# EAGLE board UHF-RLB (EAGLE 5.07)
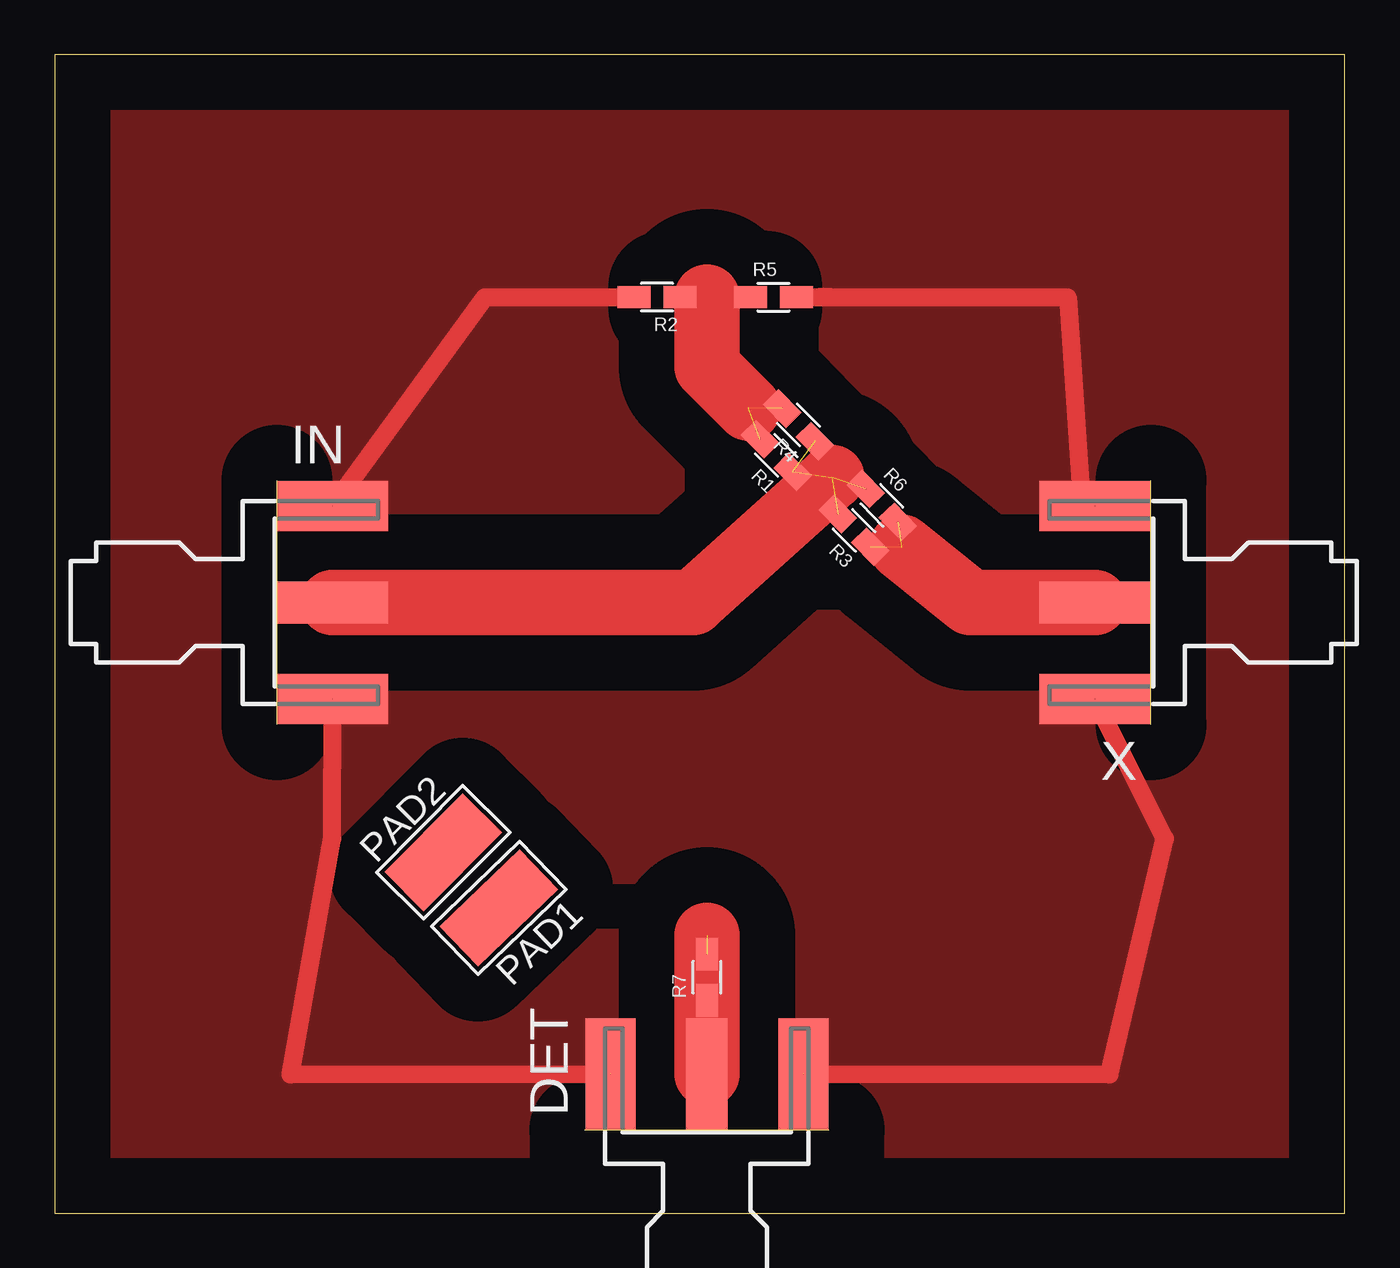
[diagram p0: board, top side]
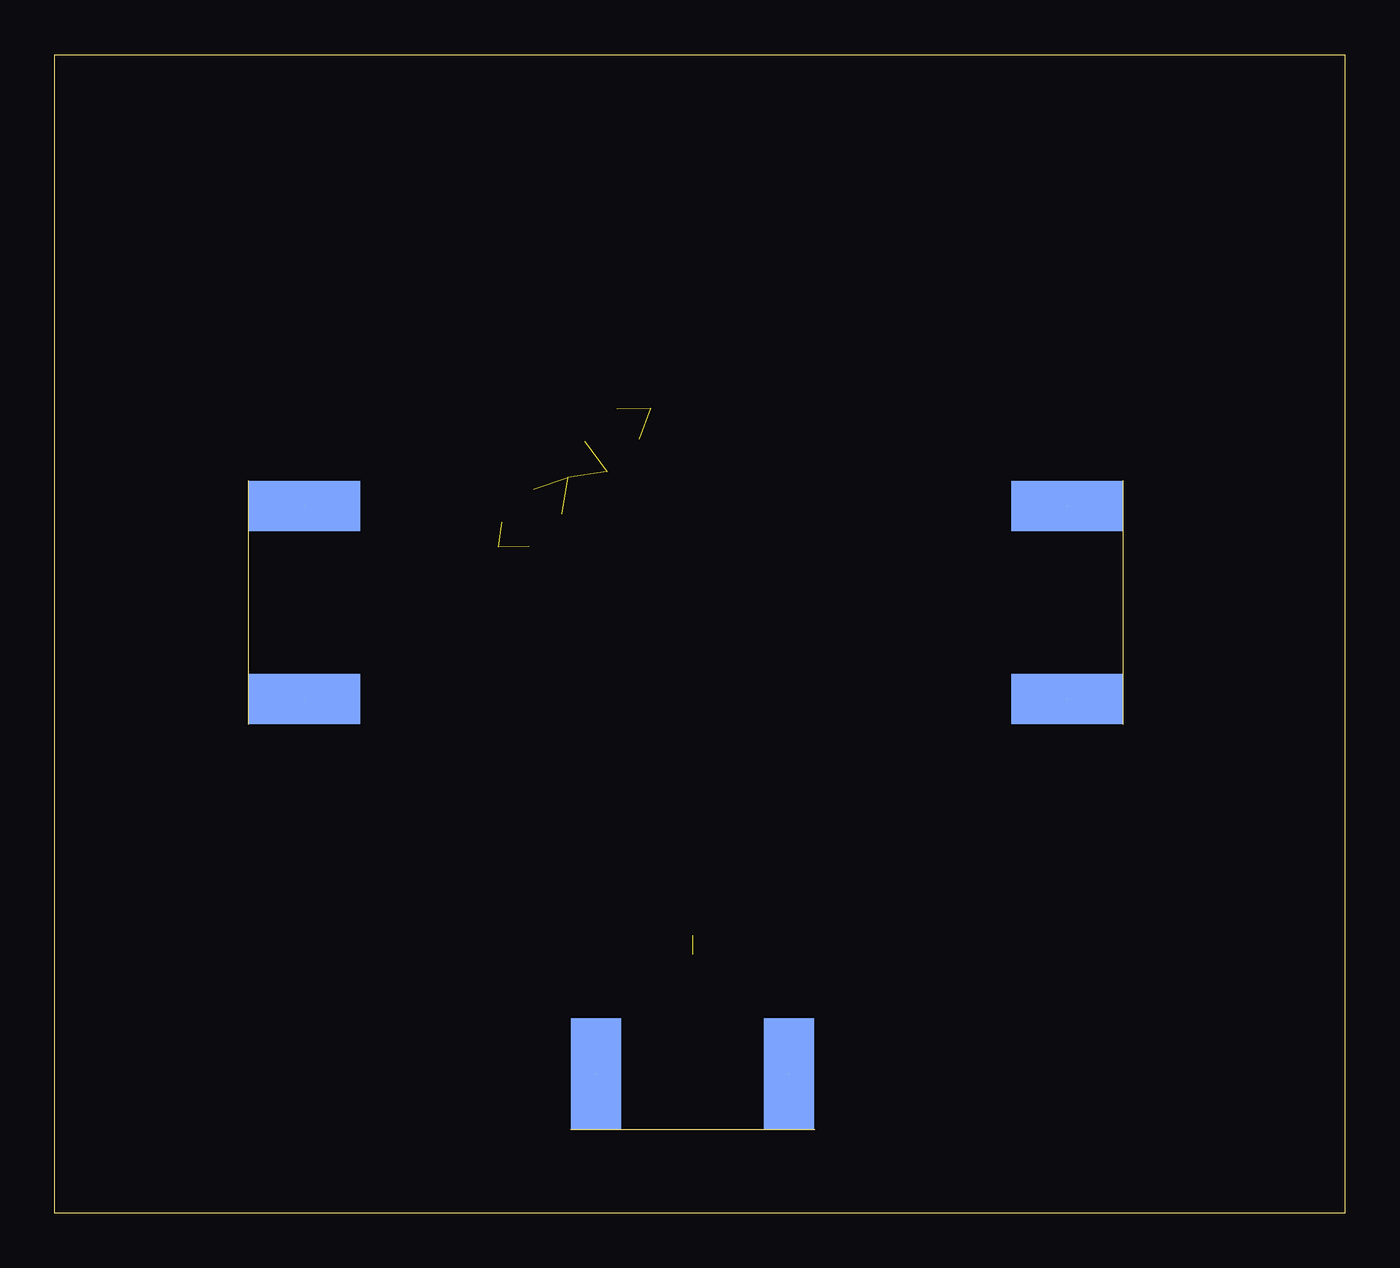
[diagram p1: board, bottom side, seen from below]

Size 59.03 x 53.01 mm. Coordinates in mm from the lower left corner, seen from the top.
Outline: 0,0 59.03,0 59.03,53.01 0,53.01 0,0
Copper layers (1*16): Top 0.035mm / dielectric 1.5mm / Bottom 0.035mm
Design rules "default": minimum track width 10mil, minimum drill 24mil, track to track 8mil, track to pad 8mil, pad to pad 8mil, via to via 8mil, smd to smd 8mil, copper to edge 40mil, drill to drill 8mil, minimum pad ring 10mil, minimum via ring 8mil, stop-mask expansion 4mil, vias tented up to drill 0mil, thermal gap 10mil

## Footprints (pad centres in the part's own frame; a part is rotated, then mirrored left to right if it is on the bottom)
J502-ND-142-0711-871/876 = smd 5.08 x 1.905: 1 2.565,0 | smd 5.08 x 2.286: G@1 2.565,4.42; G@2 2.565,-4.42 | smd 5.08 x 2.286 bottom: G@3 2.565,4.42; G@4 2.565,-4.42
5-2,5 = smd 2.54 x 5.08: 1 0,0
R0805W = smd 1.5 x 1: 1 -1.052,0; 2 1.052,0

## Placement (x,y rotation side)
DET  [J502-ND-142-0711-871/876]  29.84,3.81 90 top
IN  [J502-ND-142-0711-871/876]  10.16,27.94 0 top
PAD1  WIREPADSMD5-2,5  [5-2,5]  20.32,13.97 133.9 top
PAD2  WIREPADSMD5-2,5  [5-2,5]  17.78,16.51 315.2 top
R1  [R0805W]  33.02,34.67 135 top
R2  [R0805W]  27.56,41.91 180.1 top
R3  [R0805W]  36.58,31.24 135 top
R4  [R0805W]  34.04,36.07 135 top
R5  [R0805W]  32.89,41.91 0.1 top
R6  [R0805W]  37.85,32.38 314.3 top
R7  [R0805W]  29.84,10.79 90 top
X  [J502-ND-142-0711-871/876]  50.16,27.94 180 top

## Library data of the parts
DET IN X = dtoy-RF
PAD1 PAD2 = wirepad
R1-R7 = digital-toy

## Nets
GND: DET.G@1 DET.G@2 DET.G@3 DET.G@4 IN.G@1 IN.G@2 IN.G@3 IN.G@4 R2.2 R5.2 X.G@1 X.G@2 X.G@3 X.G@4
N$1: IN.1 R1.1 R3.2 R4.1 R6.1
N$2: R1.2 R2.1 R4.2 R5.1
N$3: R3.1 R6.2 X.1
N$4: DET.1 R7.2

## Tracks (layer width: path | path; a pad name or v marks a point on that pad's centre or on a via)
GND  (6 unrouted)
  Top 0.813: IN.G@1 19.68,41.91 25.4,41.91 R2.2 | 35.56,41.91 46.35,41.91 46.99,32.38 X.G@4 | 35.56,41.91 34.92,41.91 | IN.G@4 12.7,17.14 10.79,6.35 DET.G@1 | DET.G@4 48.26,6.35 50.8,17.14 X.G@1 | R5.2 35.56,41.91
  pour Top (isolate 2.54, rank 3, no thermals): -6.99,49.53 -4.45,55.88 0,60.33 61.59,57.79 66.04,48.9 67.95,12.06 68.58,-3.81 64.14,-6.99 38.73,-8.26 -4.45,-7.62 -6.99,6.35 -7.62,42.55
N$1  (4 unrouted)
  Top 3: IN.1 29.21,27.94 35.56,33.66
N$2  (2 unrouted)
  Top 0.813: 29.84,41.91 29.8,41.96 | 29.8,41.96 R2.1 | 29.8,41.96 R5.1
  Top 3: 31.75,36.83 29.84,38.73 29.84,41.91
N$3  (2 unrouted)
  Top 3: X.1 41.91,27.94 38.73,30.48
N$4  (1 unrouted)
  Top 3: DET.1 29.84,12.7